# Altium PCB Clock.PcbDoc
Units mm, origin at the board's own origin, x right, y up, seen from the top; angles counter-clockwise.
Board outline 58.04 x 54.48 mm, 2 copper layers (Top Layer, Bottom Layer); 27 components, 20 nets, 117 pads, 20 vias.
Unrouted connection lines stored in the file: 1.
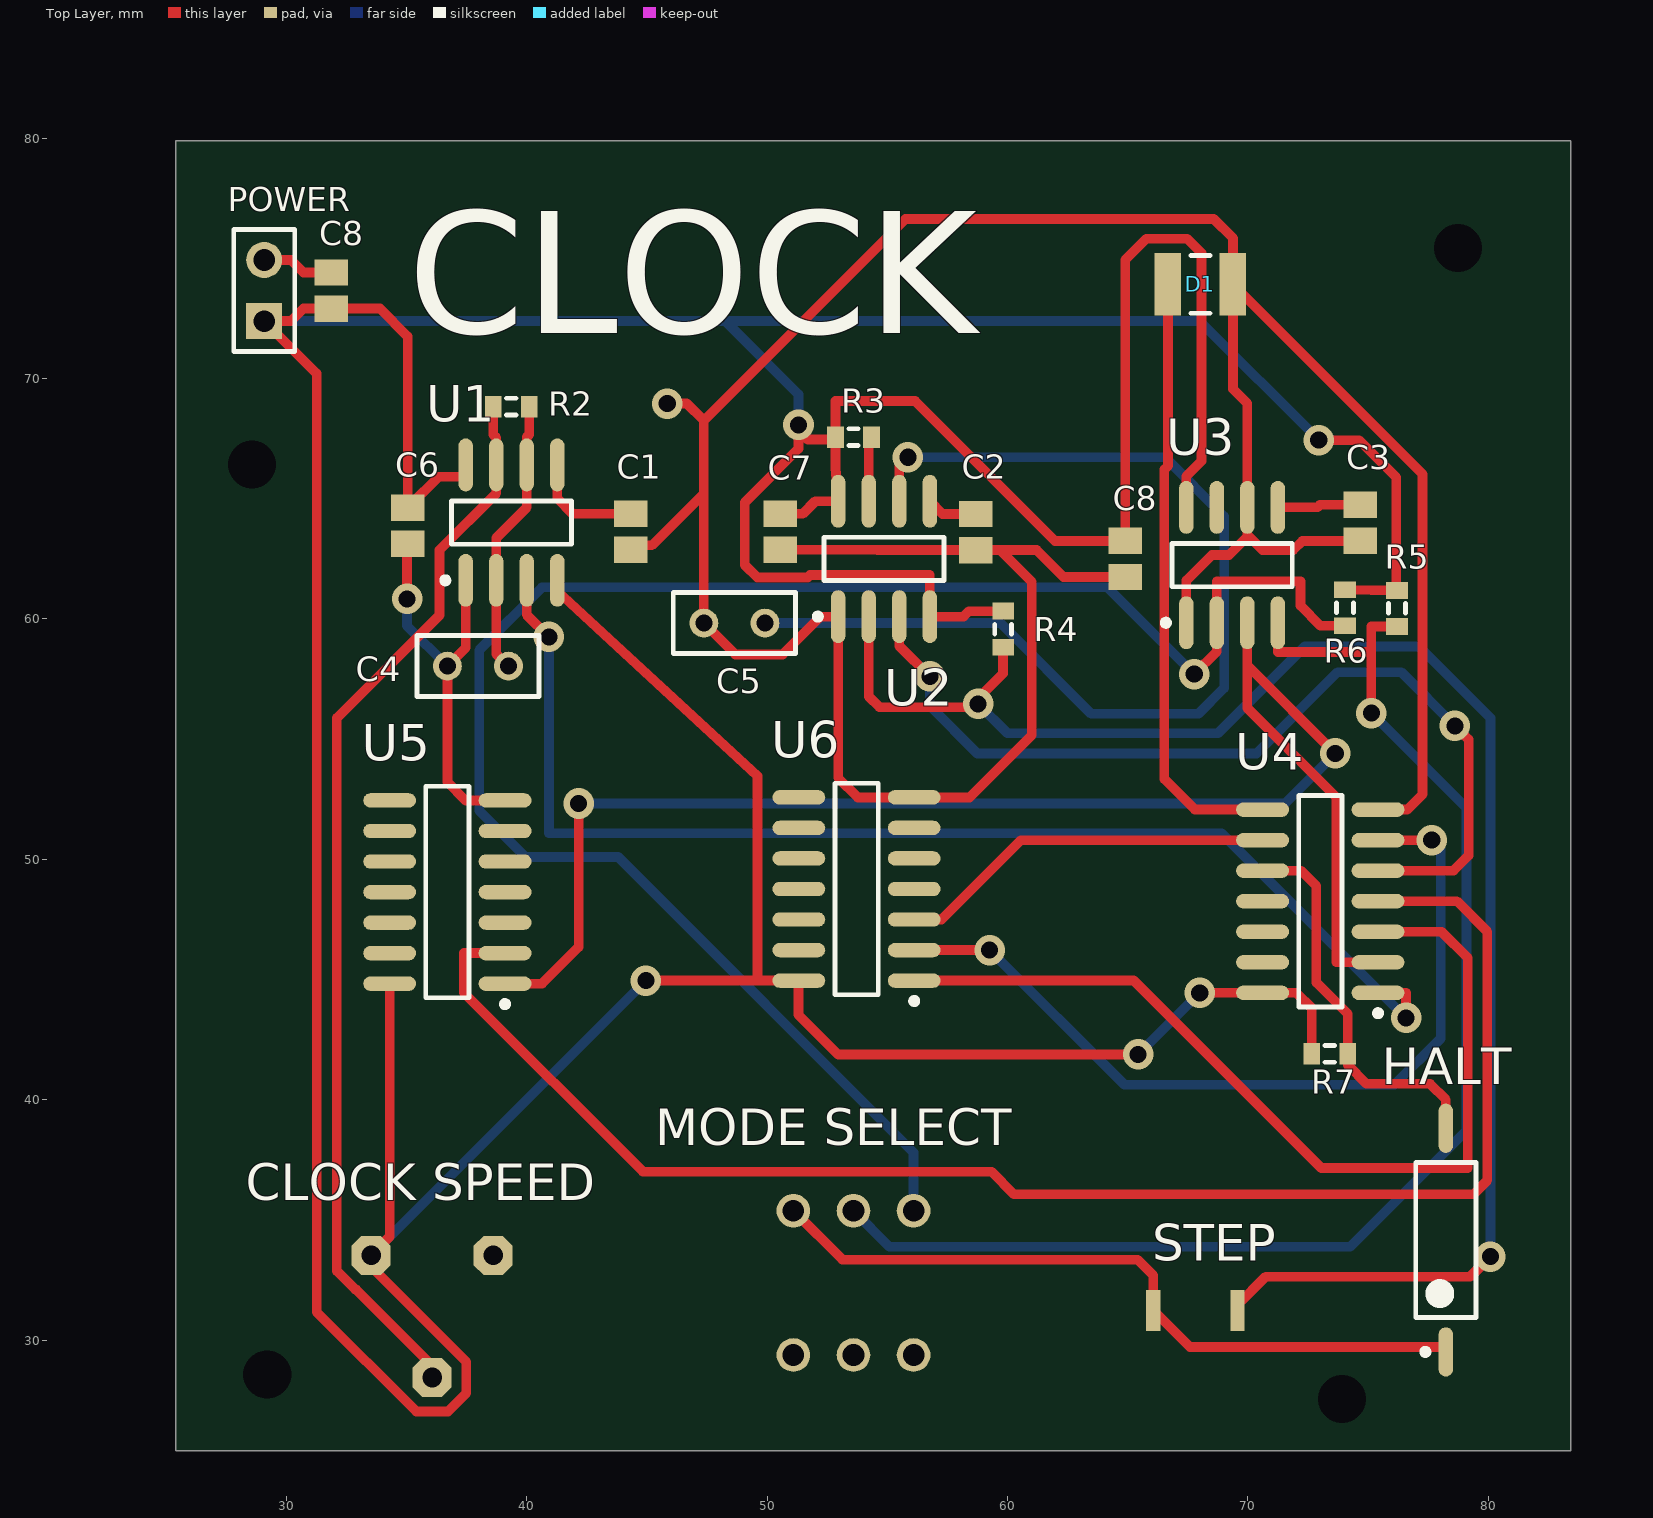
[diagram p0: Top Layer view]
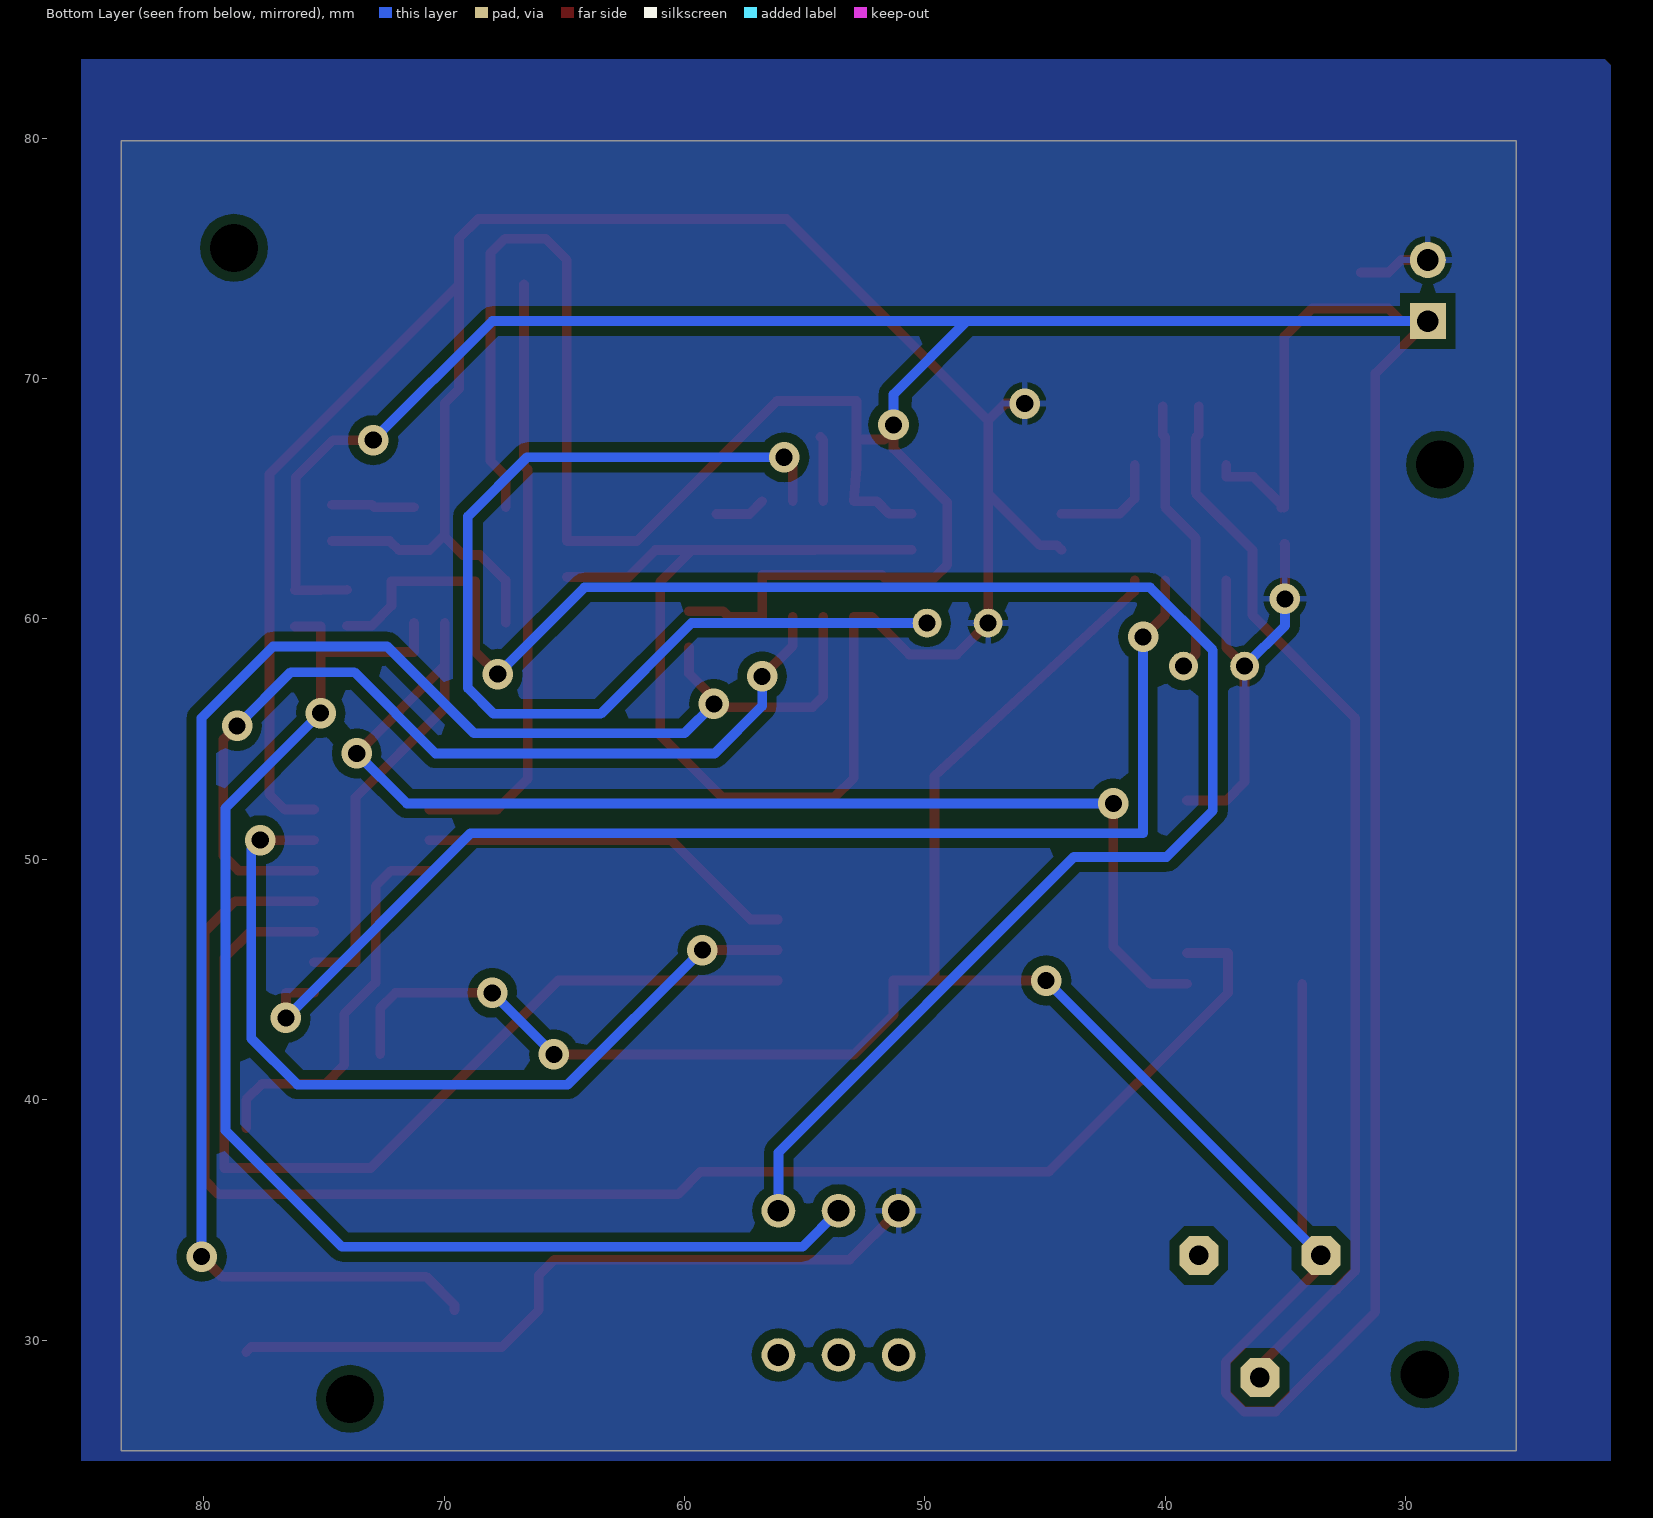
[diagram p1: Bottom Layer view, seen from below]

## Layer stack, top to bottom
Top Solder: solder mask 0.0102, Solder Resist, Dk 3.5
Top Layer: signal copper 0.0356
Dielectric 1: dielectric 0.32, FR-4, Dk 4.8
Bottom Layer: signal copper 0.0356
Bottom Solder: solder mask 0.0102, Solder Resist, Dk 3.5

## Board outline
25.4,25.4 83.439,25.4 83.439,79.883 25.4,79.883

## Design rules (kind name [scope] priority, off if disabled: settings)
Clearance [All] p1: gap=0.4 ignorepadtopadclearanceinfootprint=FALSE except(0: Arc-Hole Track-Hole SMDPad-Hole THPad-Hole Via-Hole Fill-Hole Poly-Hole Region-Hole Text-Hole)
PolygonConnect [All] p1: connectstyle=Relief reliefconductorwidth=0.254 reliefentries=4 polygonreliefangle="90 Angle" airgapwidth=0.254
RoutingVias [All] p1: holewidth=0.711 width=1.27 viastyle="Through Hole" minholewidth=0.711 minwidth=1.27 maxholewidth=0.711 maxwidth=1.27
SolderMaskExpansion [All] p1: expansion=0.102
Width [All] p1: maxlimit=0.406 minlimit=0.406 preferedwidth=0.406 minimp=50.000000 maximp=50.000000 favimp=50.000000
30 further rules are at their usual default settings.

## Classes and differential pairs
component class Clock: C1 C2 C3 C4 C5 C7 C8 R2 R3 R4 R5 R6 R7 U1 U2 U3 U4 U5 U6

## Components (designator, comment, footprint, x,y, rotation, side; value= is the part's Value field where it differs from the comment)
C1 "Cap Pol3" C0805 44.323,63.627 r270 top value=10nF
C2 "Cap Pol3" C0805 58.674,63.615 r270 top value=10nF
C3 "Cap Pol3" C0805 74.676,63.996 r270 top value=10nF
C4 "Cap Pol1" RAD-0.1 37.973,58.039 r180 top value=1uF
C5 "Cap Pol1" RAD-0.1 48.641,59.829 r0 top value=1uF
C6 "Cap Pol3" C0805 35.052,63.881 r270 top value=100nF
C7 "Cap Pol3" C0805 50.546,63.627 r270 top value=100nF
C8 "Cap Pol3" C0805 31.877,73.66 r90 top value=100nF
C8 "Cap Pol3" C0805 64.897,62.496 r270 top value=100nF
"CLOCK SPEED" "3386 Series3/8\" Square Trimmer" 3386F 36.068,30.988 r0 top (schematic designator R1)
D1 "Clock" 14-1210 68.025,73.914 r0 top
HALT "SMD Dip Switch 1 pol." SOP127P1030X250-2N 78.232,34.163 r90 top (schematic designator S3)
"MODE SELECT" "Pushbutton Switches DPDT Latching ON-ONSource:  Datasheet" GPBS800L 53.594,32.385 r180 top
POWER "Header 2" HDR1X2 29.083,72.39 r90 top (schematic designator P1)
R2 "Res3" J1-0603 39.358,68.834 r180 top value=1K
R3 "Res3" J1-0603 53.594,67.564 r180 top value=100K
R4 "Res4" J1-0603 59.817,59.575 r90 top value=1K
R5 "Res3" J1-0603 76.2,60.44 r270 top value=1K
R6 "Res3" J1-0603 74.041,60.464 r270 top value=1K
R7 "Res3" J1-0603 73.406,41.91 r0 top value=1K
STEP "SPST.B3U-1000P(M)" B3U-1000P(M) 67.818,31.242 r0 top (schematic designator SWTCH1)
U1 "Astable" D008_N 39.37,64.008 r90 top
U2 "Monostable" D008_N 54.864,62.496 r90 top
U3 "Bistable" D008_N 69.342,62.242 r90 top
U4 "SN74LS08D" D014_N 73.012,48.26 r180 top
U5 "SN74LS04D" D014_N 36.703,48.641 r180 top
U6 "SN74LS32D" D014_N 53.721,48.768 r180 top

## Footprints (in the part's own frame and the unit in brackets; to place one, negate y for a bottom-side part, rotate by r counter-clockwise, add the part's x,y. Pads: shape width x height; smd on the part's side, far side on the other; paste and mask are expansions set on the pad)
14-1210 [mm] "Chip Resistor, Body 3.2x2.5mm, IPC High Density"
  rect 1.1x2.6 smd: 1(-1.35,0) 2(1.35,0)
  silkscreen extent -0.4,-1.2 0.4,1.2, body extent -1.68,-1.32 1.68,1.32, height 0.9
3386F [mil]
  oct 63.9x63.9 / inner oct 60x60 / far side oct 63.9x63.9 hole 32: 1(-100,100) 2(0,-100) 3(100,100)
B3U-1000P(M) [mm]
  rect 0.6x1.7 smd mask+0: 1(-1.75,0) 2(1.75,0)
C0805 [mm] "Chip Capacitor, Body 2.0x1.3mm, IPC High Density"
  rect 1.1x1.4 smd: 1(-0.75,0) 2(0.75,0)
  body extent -1.1,-0.72 1.1,0.72, height 1.4
D008_N [mm] "SOIC, 8-Leads, Body 4.9x3.9mm, Pitch 1.27mm, IPC Medium Density"
  oval 2.2x0.6 smd: 1(-2.4,1.905) 2(-2.4,0.635) 3(-2.4,-0.635) 4(-2.4,-1.905) 5(2.4,-1.905) 6(2.4,-0.635) 7(2.4,0.635) 8(2.4,1.905)
  silkscreen extent -2.52,-2.5 0.9,2.88, body extent -1.95,-2.45 1.95,2.45, height 1.75
D014_N [mm] "SOIC, 14-Leads, Body 8.7x3.9mm, Pitch 1.27mm, IPC Medium Density"
  oval 2.2x0.6 smd: 1(-2.4,3.81) 2(-2.4,2.54) 3(-2.4,1.27) 4(-2.4,0) 5(-2.4,-1.27) 6(-2.4,-2.54) 7(-2.4,-3.81) 8(2.4,-3.81) 9(2.4,-2.54) 10(2.4,-1.27) 11(2.4,0) 12(2.4,1.27) 13(2.4,2.54) 14(2.4,3.81)
  silkscreen extent -2.53,-4.4 0.9,4.78, body extent -1.95,-4.33 1.95,4.33, height 1.75
GPBS800L [mm]
  round 1.4 / inner round 1.524 / far side round 1.4 hole 0.9: 1(-2.5,-3) 2(0,-3) 3(2.5,-3) 4(-2.5,3) 5(0,3) 6(2.5,3)
HDR1X2 [mm] "Connector; Header; 2 Position"
  rect 1.5x1.5 hole 0.9: 1(0,0)
  round 1.5 hole 0.9: 2(2.54,0)
  silkscreen extent -1.27,-1.27 3.81,1.27
J1-0603 [mm] "Chip Resistor, Body 1.6x0.8mm, IPC High Density"
  rect 0.7x0.9 smd: 1(-0.75,0) 2(0.75,0)
  silkscreen extent -0.2,-0.35 0.2,0.35, body extent -0.85,-0.48 0.85,0.48, height 0.9
RAD-0.1 [mm] "Radial Cap, Thru-Hole; 2 Leads; 0.1 in Pin Spacing"
  round 1.2 hole 0.7: 1(-1.27,0) 2(1.27,0)
  silkscreen extent -2.54,-1.27 2.54,1.27
SOP127P1030X250-2N [mm] "SOP, 2-Leads, Body 2.50x5.40mm, Pitch 1.27mm, IPC Medium Density"
  oval 2.05x0.6 smd: 1(-4.65,0) 2(4.65,0)
  silkscreen extent -4.77,-1.25 3.22,1.25, body extent -2.7,-1.25 2.7,1.25, height 2.5

## Part data
C1 C2 C3 C6 C7 C8 C8: "Polarized Capacitor (Surface Mount)", LatestRevisionDate=29-May-2009, LatestRevisionNote="IPC-7351 Footprint Added.", PackageDescription="Chip Capacitor", PackageReference=C0805, Published=8-Jun-2000, Publisher="Altium Limited"
C4 C5: "Polarized Capacitor (Radial)", LatestRevisionDate=17-Jul-2002, LatestRevisionNote="Re-released for DXP Platform.", PackageDescription="Polarized Capacitor (Radial); 2 Leads", PackageReference=RB7.6-15, Published=8-Jun-2000, Publisher="Altium Limited"
"CLOCK SPEED": library part 3386-F, Package=3386F, DeviceName=F, DeviceSetName=3386-, GateName_1=G$1, LibraryName=bourns_good, SymbolName_1=TPOT
D1: library part LED0, "Typical INFRARED GaAs LED", LatestRevisionDate=08-Jul-2005, LatestRevisionNote="Mech Layer 1 removed.", PackageDescription="LED; 2 Leads", PackageReference=LED-0, Published=8-Jun-2000, Publisher="Altium Limited"
HALT: library part SWS001, Package=SMS-001, DeviceSetName=SWS001, GateName_1=G$1, LibraryName=smd-special, SymbolName_1=DIP01
"MODE SELECT": library part GPBS-800L, MANUFACTURER_NAME="CW Industries", Package=GPBS800L, ARROW_PART_NUMBER=GPBS-800L, DeviceSetName=GPBS-800L, GateName_1=G$1, HEIGHT=13mm, LibraryName=GPBS-800L, MANUFACTURER_PART_NUMBER=GPBS-800L, SymbolName_1=GPBS-800L
POWER: "Header, 2-Pin", LatestRevisionDate=17-Jul-2002, LatestRevisionNote="Re-released for DXP Platform.", Publisher="Altium Limited"
R2 R3 R5 R6 R7: "Resistor", LatestRevisionDate=29-May-2009, LatestRevisionNote="IPC-7351 Footprint Added.", PackageDescription="Chip Resistor", PackageReference=J1-0603, Published=8-Jun-2000, Publisher="Altium Limited"
R4: library part Res3, "Resistor", LatestRevisionDate=29-May-2009, LatestRevisionNote="IPC-7351 Footprint Added.", PackageDescription="Chip Resistor", PackageReference=J1-0603, Published=8-Jun-2000, Publisher="Altium Limited"
STEP: Package=B3U-1000P(M), DeviceName=.B3U-1000P(M), DeviceSetName=SPST, GateName_1=G$1, LibraryName=smd_switches, SymbolName_1=SPST
U1 U2 U3: library part NE555D, "Precision Timer", Code_IPC=SOIC127P600-8, ComponentLink1Description="Manufacturer Link", ComponentLink1URL=http://www.ti.com/, ComponentLink2Description=Datasheet, ComponentLink2URL=http://www-s.ti.com/sc/ds/ne555.pdf, DatasheetVersion=Feb-1992, LatestRevisionDate=13-Apr-2006, LatestRevisionNote="IPC-7351 Footprint Added.", PackageDescription="8-Pin Small Outline Integrated Circuit 1.27 mm Pitch", PackageReference=D008, PackageVersion=Jan-1998, Published=16-Jan-2001, Publisher="Altium Limited"
U4: "Quadruple 2-Input Positive-AND Gate", Code_IPC=SOIC127P600-14, ComponentLink1Description="Manufacturer Link", ComponentLink1URL=http://www.ti.com/, ComponentLink2Description=Datasheet, ComponentLink2URL=http://www-s.ti.com/sc/ds/SN74LS08.pdf, DatasheetVersion=Mar-1988, LatestRevisionDate=13-Apr-2006, LatestRevisionNote="IPC-7351 Footprint Added.", PackageDescription="14-Pin Small Outline Integrated Circuit 1.27 mm Pitch", PackageReference=D014, PackageVersion=Jan-1998, Published=8-Jun-2000, Publisher="Altium Limited"
U5: "Hex Inverter", Code_IPC=SOIC127P600-14, ComponentLink1Description="Manufacturer Link", ComponentLink1URL=http://www.ti.com/, ComponentLink2Description=Datasheet, ComponentLink2URL=http://www-s.ti.com/sc/ds/sn74ls04.pdf, DatasheetVersion=Mar-1988, LatestRevisionDate=13-Apr-2006, LatestRevisionNote="IPC-7351 Footprint Added.", PackageDescription="14-Pin Small Outline Integrated Circuit 1.27 mm Pitch", PackageReference=D014, PackageVersion=Jan-1998, Published=8-Jun-2000, Publisher="Altium Limited"
U6: "Quadruple 2-Input Positive-OR Gate", Code_IPC=SOIC127P600-14, ComponentLink1Description="Manufacturer Link", ComponentLink1URL=http://www.ti.com/, ComponentLink2Description=Datasheet, ComponentLink2URL=http://www-s.ti.com/sc/ds/sn74ls32.pdf, DatasheetVersion=Mar-1988, LatestRevisionDate=13-Apr-2006, LatestRevisionNote="IPC-7351 Footprint Added.", PackageDescription="14-Pin Small Outline Integrated Circuit 1.27 mm Pitch", PackageReference=D014, PackageVersion=Jan-1998, Published=8-Jun-2000, Publisher="Altium Limited"

## Free pads (board coordinates)
  round 1.524 hole 2: 2(78.74,75.438) 3(29.21,28.575) 6(73.914,27.559) 7(28.575,66.421)

## Via types
v1: diameter 1.27, hole 0.711, Top Layer to Bottom Layer, 20 vias

## Nets (pads, with @x,y where several pads share a name; then routed paths per layer and width w, separated by ;. In a path a pad name is that pad's centre, name@x,y a point inside that pad or via, vN(x,y) a via of type N, cw(c..) or ccw(c..) an arc to the next point about the centre after c; other vN are vias at no path point)
GND: "MODE SELECT.3" C1.2 C2.2 C3.2 C4.2 C5.1 C6.2 C7.2 C8.2 D1.2 HALT.1 POWER.2 STEP.1 U1.1 U2.1 U3.1 U3.6 U4.7 U5.7 U6.7 | length 186.2
  Top Layer w0.406: POWER.2 30.201,74.93 30.721,74.41 C8.2@31.877,74.41 ; v1(35.027,60.833) 35.027,63.131 C6.2 ; U1.1 37.465,58.801 C4.2 36.703,53.213 37.465,52.451 U5.7 ; C1.2 44.508,63.061 45.205,63.061 47.371,65.227 ; v1(45.847,68.961) 46.66,68.961 47.371,68.25 ; C7.2 54.585,62.877 54.597,62.865 C2.2 59.69,62.865 ; 51.094,35.385 53.129,33.35 65.405,33.35 66.068,32.687 STEP.1 67.592,29.718 78.027,29.718 HALT.1 ; C8.2@64.897,61.746 62.333,61.746 61.214,62.865 59.69,62.865 ; U3.1 67.437,61.595 68.504,62.662 69.215,62.662 69.977,63.424 69.977,63.5 ; C3.2 72.263,63.246 71.882,62.865 70.612,62.865 69.977,63.5 ; U4.7 76.632,52.07 77.267,52.705 77.267,66.022 D1.2 ; 47.371,65.227 47.371,68.25 ; 47.371,65.227 C5.1 48.678,58.522 50.648,58.522 52.222,60.096 U2.1 52.959,53.393 53.774,52.578 U6.7 58.42,52.578 61.011,55.169 61.011,61.544 59.69,62.865 ; 47.371,68.25 55.753,76.632 68.58,76.632 69.375,75.837 D1.2 ; D1.2 69.375,69.563 69.977,68.961 U3.6 69.977,63.5
  Bottom Layer w0.406: v1(35.027,60.833) 35.027,59.715 C4.2
NetC1_1: C1.1 U1.5 | length 4.7
  Top Layer w0.406: U1.5 41.275,65.012 41.91,64.377 C1.1
NetC2_1: C2.1 U2.5 | length 2.1
  Top Layer w0.406: U2.5 57.3,64.365 C2.1
NetC3_1: C3.1 U3.5 | length 3.5
  Top Layer w0.406: U3.5 72.898,64.642 73.002,64.746 C3.1
NetC4_1: C4.1 R2.1 U1.2 U1.6 | length 11.6
  Top Layer w0.406: C4.1 38.735,58.547 U1.2 38.735,63.373 40.005,64.643 U1.6 40.005,67.564 40.108,67.667 R2.1
NetC5_2: C5.2 R3.1 U2.6 U2.7 | length 47.1
  Top Layer w0.406: U2.7 54.229,67.449 R3.1 ; U2.6 55.499,66.37 v1(55.855,66.726)
  Bottom Layer w0.406: C5.2 59.71,59.829 63.481,56.058 67.945,56.058 69.012,57.125 69.012,64.262 66.548,66.726 v1(55.855,66.726)
"NetCLOCK SPEED_2": "CLOCK SPEED.2" R2.2 U1.7 | length 44.8
  Top Layer w0.406: 36.068,28.448 36.068,28.956 32.911,32.113 32.872,32.113 32.106,32.88 32.106,55.886 36.373,60.153 36.373,62.865 38.735,65.227 U1.7 38.735,67.539 38.608,67.666 R2.2
NetD1_1: D1.1 U4.8 | length 25.3
  Top Layer w0.406: D1.1 66.675,66.37 66.523,66.218 66.523,53.34 67.793,52.07 U4.8
NetHALT_2: HALT.2 R7.2 U4.10 | length 16.4
  Top Layer w0.406: U4.10 72.212,49.53 72.847,48.895 72.847,44.882 74.156,43.573 R7.2 74.156,41.439 74.93,40.665 77.572,40.665 78.232,40.005 HALT.2
"NetMODE SELECT_1": "MODE SELECT.1" R6.2 U3.2 | length 76.3
  Top Layer w0.406: v1(67.767,57.709) 68.707,58.649 U3.2 68.707,61.57 72.187,61.57 72.187,60.552 73.025,59.714 R6.2
  Bottom Layer w0.406: 56.094,35.385 56.094,37.811 43.809,50.096 39.952,50.096 38.024,52.025 38.024,58.699 40.64,61.316 64.16,61.316 v1(67.767,57.709)
"NetMODE SELECT_2": "MODE SELECT.2" R5.2 U3.4 | length 56.9
  Top Layer w0.406: U3.4 71.247,58.623 75.133,58.623 ; v1(75.133,56.083) 75.133,58.623 ; R5.2 75.133,59.69 75.133,58.623
  Bottom Layer w0.406: 53.594,35.385 55.095,33.884 74.244,33.884 79.087,38.727 79.087,52.129 v1(75.133,56.083)
NetR4_1: R4.1 STEP.2 U2.2 | length 69.5
  Top Layer w0.406: U2.2 54.229,56.769 54.669,56.329 58.42,56.329 v1@58.776,56.685 ; v1(58.776,56.464) v1@58.776,56.685 ; R4.1 59.817,57.726 v1@58.776,56.685 ; STEP.2 69.568,31.468 70.739,32.639 79.248,32.639 v1(80.086,33.477)
  Bottom Layer w0.406: v1(58.776,56.464) 59.995,55.245 68.758,55.245 72.365,58.852 77.114,58.852 80.086,55.88 v1(80.086,33.477)
NetU1_3: U1.3 U4.1 | length 51.9
  Top Layer w0.406: U1.3 40.005,60.173 v1(40.926,59.252) ; U4.1 76.581,44.45 v1(76.581,43.409)
  Bottom Layer w0.406: v1(40.926,59.252) 40.926,51.086 68.904,51.086 v1(76.581,43.409)
NetU2_3: U2.3 U4.5 | length 38.9
  Top Layer w0.406: U2.3 55.499,58.877 v1(56.769,57.607) ; U4.5 78.547,49.53 79.182,50.165 79.182,54.981 v1(78.613,55.55)
  Bottom Layer w0.406: v1(56.769,57.607) 56.769,56.38 58.742,54.407 70.358,54.407 73.736,57.785 76.378,57.785 v1(78.613,55.55)
NetU3_3: U3.3 U4.2 U5.1 | length 64.6
  Top Layer w0.406: U5.1 40.64,44.831 42.164,46.355 v1(42.164,52.324) ; U3.3 69.977,58.064 ; v1(73.635,54.407) 69.977,58.064 ; U4.2 73.685,45.72 73.685,52.578 69.977,56.286 69.977,58.064
  Bottom Layer w0.406: v1(42.164,52.324) 71.552,52.324 v1(73.635,54.407)
NetU4_3: U4.3 U6.1 | length 39.2
  Top Layer w0.406: U6.1 65.253,44.958 73.05,37.16 79.146,37.16 79.146,45.898 78.054,46.99 U4.3
NetU4_4: U4.4 U5.2 | length 65.1
  Top Layer w0.406: U5.2 37.389,46.101 37.389,44.45 44.831,37.008 59.334,37.008 60.274,36.068 79.375,36.068 79.959,36.652 79.959,46.99 78.689,48.26 U4.4
NetU4_6: U4.6 U6.2 | length 35.7
  Top Layer w0.406: U6.2 v1(59.258,46.228) ; U4.6 v1(77.648,50.8)
  Bottom Layer w0.406: v1(59.258,46.228) 64.858,40.628 76.106,40.628 78.022,42.545 78.022,50.425 v1(77.648,50.8)
NetU4_9: U4.9 U6.3 | length 15.9
  Top Layer w0.406: U6.3 57.258,47.498 60.56,50.8 U4.9
VCC: "CLOCK SPEED.1" C6.1 C7.1 C8.1 POWER.1 R3.2 R4.2 R5.1 R6.1 R7.1 U1.4 U1.8 U2.4 U2.8 U3.8 U4.14 U5.14 U6.14 | length 287.1
  Top Layer w0.406: U5.14 34.303,34.303 33.528,33.528 33.528,33.058 37.49,29.096 37.49,27.8 36.724,27.033 35.412,27.033 31.267,31.178 31.267,70.206 POWER.1 30.201,72.39 30.721,72.91 31.877,72.91 33.897,72.91 35.052,71.755 C6.1 ; C6.1@35.179,64.631 35.179,64.758 36.334,65.913 37.465,65.913 U1.8 ; U1.4 41.275,61.163 49.606,53.467 49.606,44.958 ; v1(44.958,44.958) 49.606,44.958 ; C7.1 51.486,64.377 52.005,64.896 U2.8 52.844,66.282 R3.2@52.844,67.462 ; v1(51.308,68.072) v1@51.308,67.843 ; U6.14 U6.14@51.308,44.958 ; R4.2 58.395,60.325 58.166,60.096 U2.4 56.769,61.824 51.791,61.824 51.689,61.722 49.598,61.722 49.073,62.247 49.073,64.846 51.308,67.081 v1@51.308,67.843 ; v1(65.43,41.885) 52.959,41.885 51.308,43.536 U6.14@51.308,44.958 ; U3.8 67.437,65.938 68.072,66.573 68.072,75.22 67.473,75.819 65.786,75.819 64.897,74.93 64.897,63.246 61.976,63.246 56.159,69.063 52.844,69.063 R3.2 R3.2@52.844,67.462 ; v1(67.996,44.45) U4.14 72.021,44.45 72.656,43.815 R7.1 ; v1(72.949,67.437) 74.625,67.437 76.175,65.888 R5.1@76.175,61.19 ; R6.1 75.132,61.19 R5.1@76.175,61.19 ; R5.1 R5.1@76.175,61.19 ; 49.606,44.958 U6.14@51.308,44.958 ; v1@51.308,67.843 51.689,67.462 R3.2@52.844,67.462
  Bottom Layer w0.406: POWER.1 48.26,72.39 ; 33.528,33.528 v1(44.958,44.958) ; v1(51.308,68.072) 51.308,69.342 48.26,72.39 ; v1(65.43,41.885) v1(67.996,44.45) ; v1(72.949,67.437) 67.996,72.39 48.26,72.39
pads on no net: "CLOCK SPEED.3" "MODE SELECT.4" "MODE SELECT.5" "MODE SELECT.6" U3.7 U4.11 U4.12 U4.13 U5.3 U5.4 U5.5 U5.6 U5.8 U5.9 U5.10 U5.11 U5.12 U5.13 U6.4 U6.5 U6.6 U6.8 U6.9 U6.10 U6.11 U6.12 U6.13

## Polygon pours and split planes (outlines as drawn)
GND on Bottom Layer "GND" (solid, pour order 16): 21.47,83.031 21.724,83.285 85.097,83.285 85.097,24.992 21.47,24.992

## Silkscreen, mask and mechanical layers (free items; w line width, h text height)
Top Overlay:
  text "CLOCK" at 35.052,71.882 h5.08